# Altium PCB Extend Board-20131128.PcbDoc
Units mil, origin at the board's own origin, x right, y up, seen from the top; angles counter-clockwise.
Board outline 3590 x 3685 mil, 2 copper layers (Top Layer, Bottom Layer); 24 components, 40 nets, 168 pads, 6 vias.
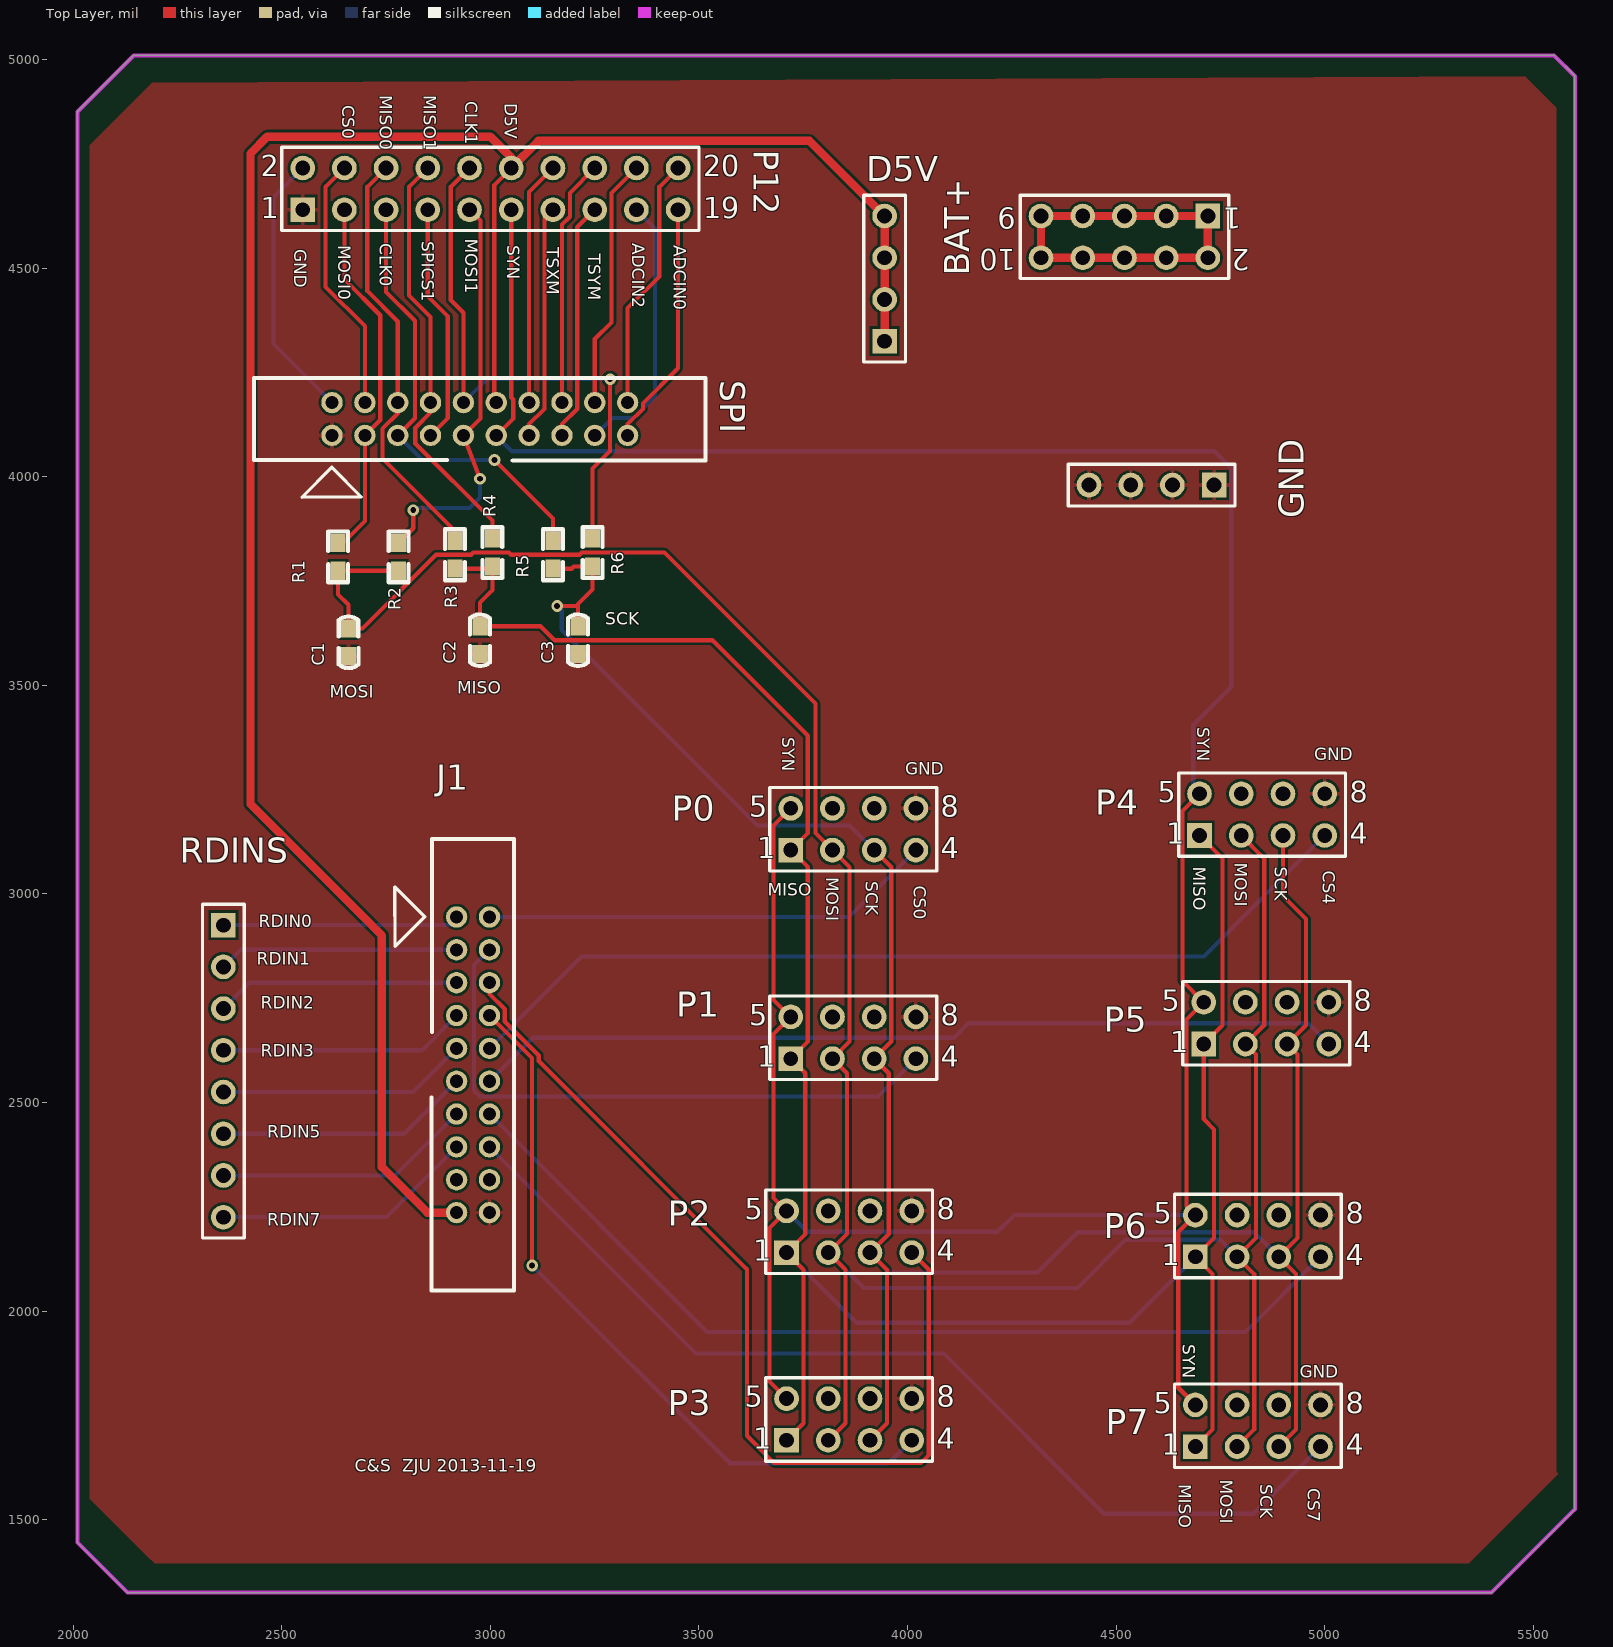
[diagram p0: Top Layer view]
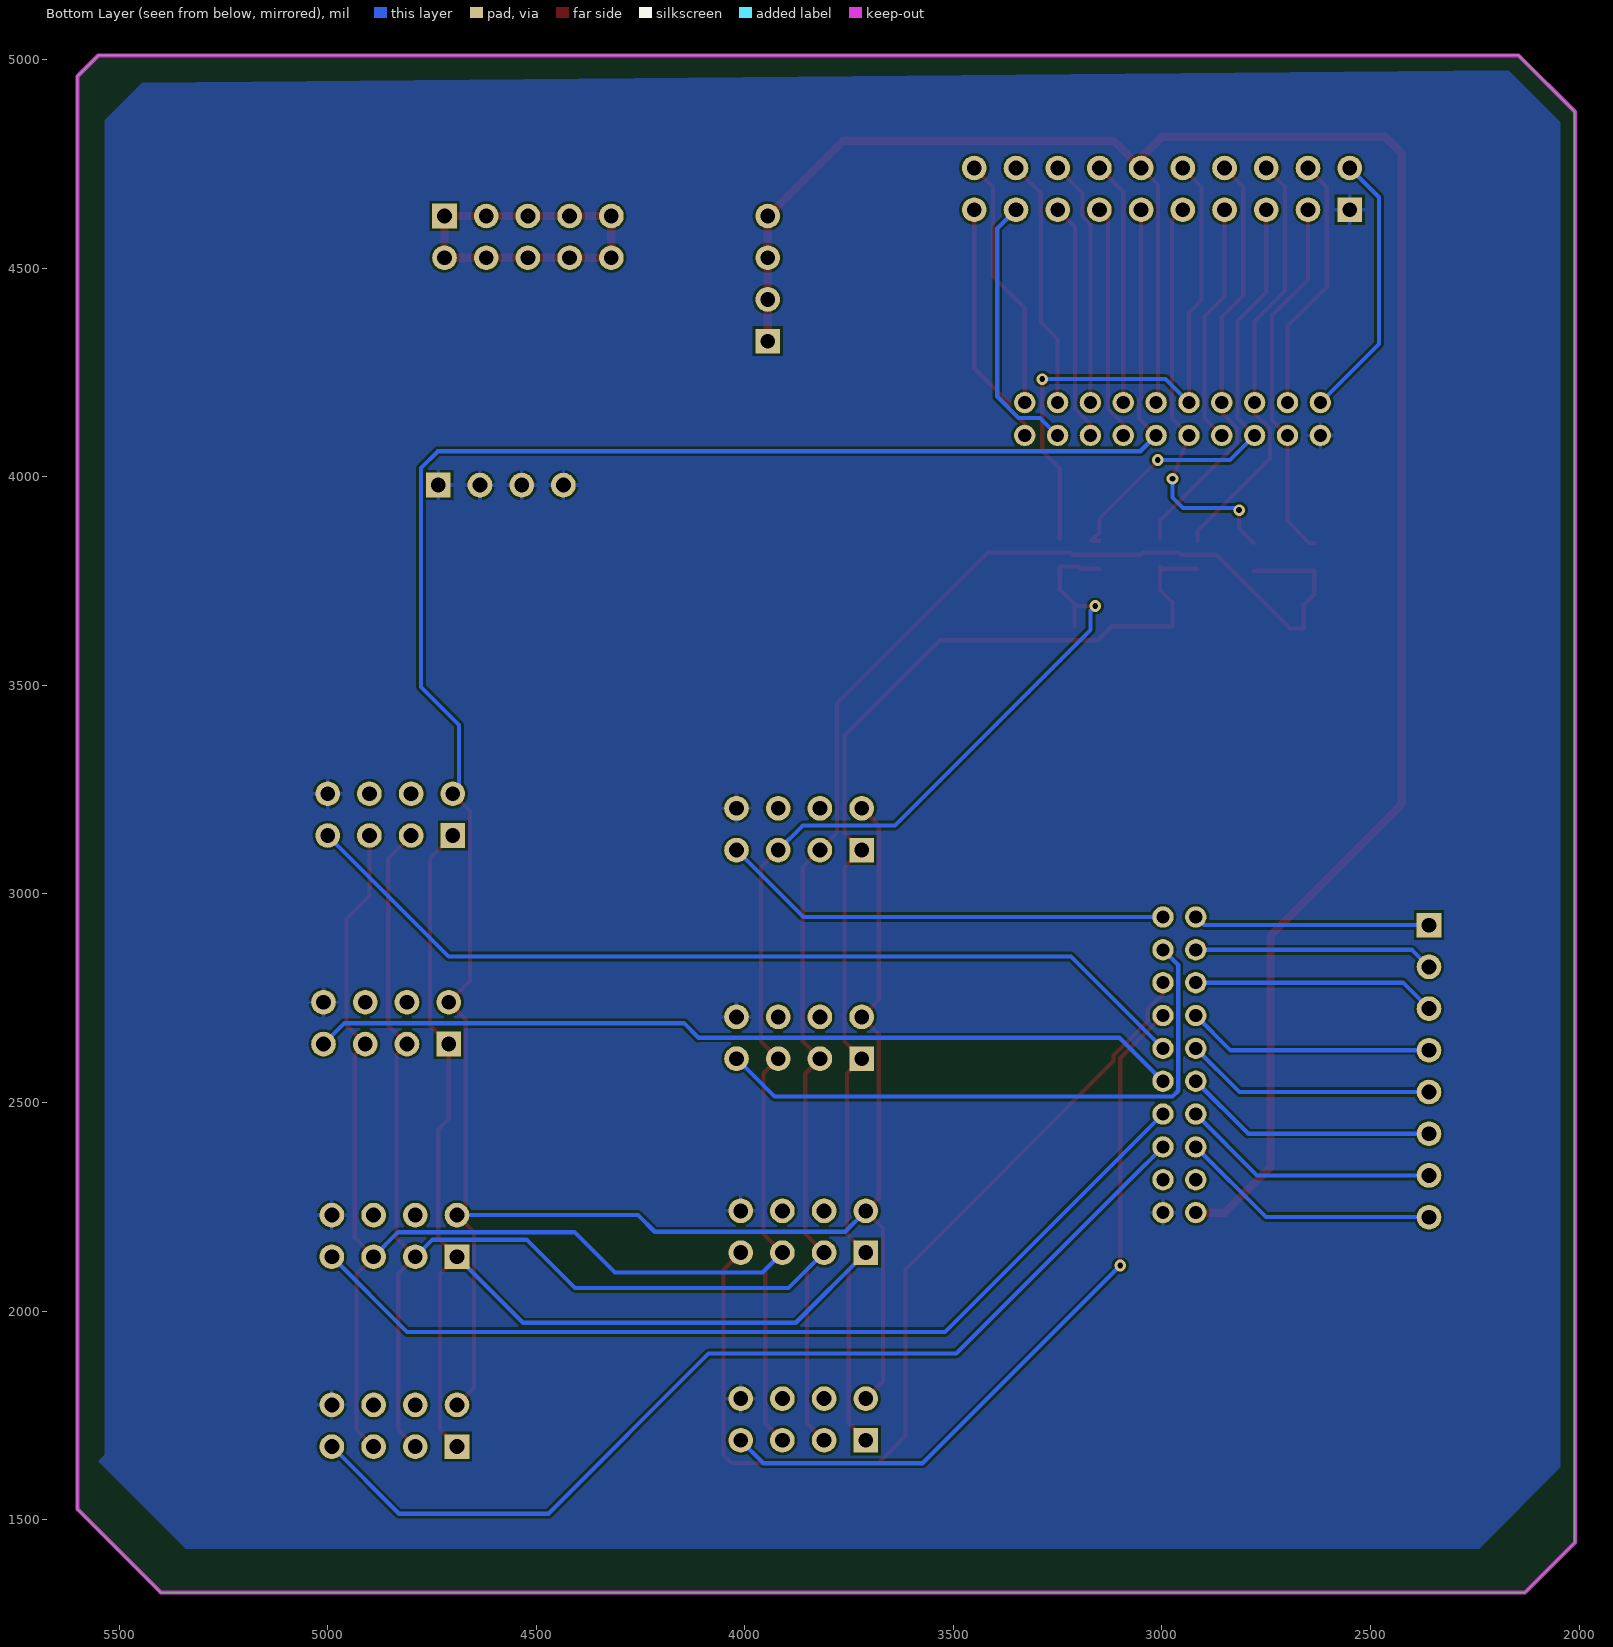
[diagram p1: Bottom Layer view, seen from below]

## Layer stack, top to bottom
Top Layer: signal copper 1.4
Dielectric: dielectric 12.6, FR-4, Dk 4.8
Bottom Layer: signal copper 1.4

## Board outline
2010,1445 2130,1325 5400,1325 5600,1525 5600,4960 5550,5010 2145,5010 2010,4875

## Design rules (kind name [scope] priority, off if disabled: settings)
Clearance [All] p1: gap=6
MinimumSolderMaskSliver [All] p1: minsoldermaskwidth=6
PolygonConnect [All] p1: connectstyle=Relief reliefconductorwidth=10 reliefentries=4 polygonreliefangle="90 Angle"
RoutingVias [All] p1: holewidth=14 width=28 viastyle="Through Hole" minholewidth=14 minwidth=20 maxholewidth=14 maxwidth=50
SilkscreenOverComponentPads [All] p1: minsilkscreentomaskgap=6
SolderMaskExpansion [All] p1: expansion=4
Width [All] p1: maxlimit=20 minlimit=8 preferedwidth=10 minimp=50.000000 maximp=50.000000 favimp=50.000000
26 further rules are at their usual default settings.

## Components (designator, comment, footprint, x,y, rotation, side; value= is the part's Value field where it differs from the comment)
BAT+ "Header 5X2" HDR2X5 4720,4625 r180 top
C1 "CAP" 0603_CAP 2660,3605 r90 top
C2 "CAP" 0603_CAP 2975,3610 r90 top
C3 "CAP" 0603_CAP 3210,3610 r90 top
D5V "Header 4" HDR1X4 3945,4325 r90 top (schematic designator P9)
GND "Header 4" HDR1X4 4735,3980 r180 top (schematic designator P10)
J1 "CON20" IDC20S 2920,2945 r270 top
P0 "Header 4X2A" HDR2X4_CEN 3720,3105 r0 top (schematic designator P1)
P1 "Header 4X2A" HDR2X4_CEN 3720,2605 r0 top (schematic designator P2)
P2 "Header 4X2A" HDR2X4_CEN 3710,2140 r0 top (schematic designator P3)
P3 "Header 4X2A" HDR2X4_CEN 3710,1690 r0 top (schematic designator P4)
P4 "Header 4X2A" HDR2X4_CEN 4700,3140 r0 top (schematic designator P5)
P5 "Header 4X2A" HDR2X4_CEN 4710,2640 r0 top (schematic designator P6)
P6 "Header 4X2A" HDR2X4_CEN 4690,2130 r0 top (schematic designator P7)
P7 "Header 4X2A" HDR2X4_CEN 4690,1675 r0 top (schematic designator P8)
P12 "Header 10X2" HDR2X10 2550,4640 r0 top
R1 "10K" 0603 2635,3810 r90 top
R2 "10K" 0603 2780,3810 r90 top
R3 "10K" 0603 2915,3815 r90 top
R4 "10K" 0603 3005,3820 r90 top
R5 "10K" 0603 3150,3815 r90 top
R6 "10K" 0603 3245,3820 r90 top
RDINS "Header 8" HDR1X8 2360,2925 r270 top (schematic designator P11)
SPI "CON20" IDC20S 2620,4100 r0 top (schematic designator J2)

## Footprints (in the part's own frame and the unit in brackets; to place one, negate y for a bottom-side part, rotate by r counter-clockwise, add the part's x,y. Pads: shape width x height; smd on the part's side, far side on the other; paste and mask are expansions set on the pad)
0603 [mm]
  rect 1.1x0.9 smd: 1(-0.9,0) 2(0.8,0)
  silkscreen extent -1.6,-0.6 1.5,0.6
0603_CAP [mm]
  rect 1.1x0.9 smd: 1(-0.9,0) 2(0.8,0)
  silkscreen extent -1.62,-0.6 1.52,0.6
HDR1X4 [mm] "Connector; Header; 4 Position"
  rect 1.5x1.5 hole 0.9: 1(0,0)
  round 1.5 hole 0.9: 2(2.54,0) 3(5.08,0) 4(7.62,0)
  silkscreen extent -1.27,-1.27 8.89,1.27
HDR1X8 [mm] "Connector; Header; 8 Position"
  rect 1.5x1.5 hole 0.9: 1(0,0)
  round 1.5 hole 0.9: 2(2.54,0) 3(5.08,0) 4(7.62,0) 5(10.16,0) 6(12.7,0) 7(15.24,0) 8(17.78,0)
  silkscreen extent -1.27,-1.27 19.05,1.27
HDR2X4_CEN [mm] "Connector; Header; 4x2 Position"
  rect 1.5x1.5 hole 0.9: 1(0,0)
  round 1.5 hole 0.9: 2(2.54,0) 3(5.08,0) 4(7.62,0) 5(0,2.54) 6(2.54,2.54) 7(5.08,2.54) 8(7.62,2.54)
  silkscreen extent -1.27,-1.27 8.89,3.81
HDR2X5 [mm] "Connector; Header; 5x2 Position"
  rect 1.5x1.5 hole 0.9: 1(0,0)
  round 1.5 hole 0.9: 2(0,2.54) 3(2.54,0) 4(2.54,2.54) 5(5.08,0) 6(5.08,2.54) 7(7.62,0) 8(7.62,2.54) 9(10.16,0) 10(10.16,2.54)
  silkscreen extent -1.27,-1.27 11.43,3.81
HDR2X10 [mm] "Connector; Header; 10x2 Position"
  rect 1.5x1.5 hole 0.9: 1(0,0)
  round 1.5 hole 0.9: 2(0,2.54) 3(2.54,0) 4(2.54,2.54) 5(5.08,0) 6(5.08,2.54) 7(7.62,0) 8(7.62,2.54) 9(10.16,0) 10(10.16,2.54) 11(12.7,0) 12(12.7,2.54) 13(15.24,0) 14(15.24,2.54) 15(17.78,0) 16(17.78,2.54) 17(20.32,0) 18(20.32,2.54) 19(22.86,0) 20(22.86,2.54)
  silkscreen extent -1.27,-1.27 24.13,3.81
IDC20S [mm]
  round 1.3 hole 0.8: 1(0.01,-0.025) 2(0.01,1.975) 3(2.01,-0.025) 4(2.01,1.975) 5(4.01,-0.025) 6(4.01,1.975) 7(6.01,-0.025) 8(6.01,1.975) 9(8.01,-0.025) 10(8.01,1.975) 11(10.01,-0.025) 12(10.01,1.975) 13(12.01,-0.025) 14(12.01,1.975) 15(14.01,-0.025) 16(14.01,1.975) 17(16.01,-0.025) 18(16.01,1.975) 19(18.01,-0.025) 20(18.01,1.975)
  silkscreen extent -4.74,-3.78 22.76,3.47

## Part data
BAT+: "Header, 5-Pin, Dual row"
D5V GND: "Header, 4-Pin"
P0 P1 P2 P3 P4 P5 P6 P7: "Header, 4-Pin, Dual row"
P12: "Header, 10-Pin, Dual row"
R1 R2 R3 R4 R5 R6: library part RES
RDINS: "Header, 8-Pin"

## Via types
v1: diameter 28, hole 14, Top Layer to Bottom Layer, 6 vias

## Nets (pads, with @x,y where several pads share a name; then routed paths per layer and width w, separated by ;. In a path a pad name is that pad's centre, name@x,y a point inside that pad or via, vN(x,y) a via of type N, cw(c..) or ccw(c..) an arc to the next point about the centre after c; other vN are vias at no path point)
ADCIN0: P12.19 SPI.19 | length 591.1
  Top Layer w10: SPI.19 3329.05,4126 3365.64,4162.59 3365.64,4175.64 3450,4260 P12.19
ADCIN1: P12.20 SPI.20 | length 612.4
  Top Layer w10: SPI.20 3329.05,4404.05 3405,4480 3405,4695 P12.20
ADCIN2: P12.17 SPI.17 | length 649.9
  Bottom Layer w10: SPI.17 3292.46,4141.16 3344.2,4141.16 3395,4191.95 3395,4595 P12.17
ADCIN3: P12.18 SPI.18 | length 603.5
  Top Layer w10: SPI.18 3250.31,4330.31 3290,4370 3290,4622.16 3290.53,4622.69 3290.53,4680.53 P12.18
BAT+: BAT+.1 BAT+.2 BAT+.3 BAT+.4 BAT+.5 BAT+.6 BAT+.7 BAT+.8 BAT+.9 BAT+.10 | length 1002.1
  Top Layer w20: BAT+.9@4315,4625 4320,4620 BAT+.10 BAT+.8 BAT+.6 BAT+.4 BAT+.2 BAT+.1 BAT+.3 BAT+.5 BAT+.7 BAT+.9
CS0: J1.2 P0.4 | length 1088.7
  Bottom Layer w10: J1.2 3859.61,2944.61 P0.4
CS1: J1.4 P1.4 | length 1455.6
  Bottom Layer w10: J1.4 2961,2829.13 2961,2528 2975,2514 3929,2514 P1.4
CS2: J1.6 P2.4 | length 2314.6
  Top Layer w10: J1.6 2997.75,2760.14 3034.34,2723.55 3034.34,2694.43 3116,2612.77 3116,2599 3615,2100 3615,1701 3680,1636 4032,1636 4051,1655 4051,2099 P2.4
CS3: J1.8 P3.4 | length 1770.9
  Top Layer w10: J1.8 3100,2606.14 v1(3100,2109)
  Bottom Layer w10: v1(3100,2109) 3574,1635 3955,1635 P3.4
CS4: J1.10 P4.4 | length 2213.6
  Bottom Layer w10: J1.10 3218.09,2850 4710,2850 P4.4
CS5: J1.12 P5.4 | length 2090.6
  Bottom Layer w10: J1.12 3076.83,2630 3101.83,2655 4111,2655 4146,2690 4960,2690 P5.4
CS6: J1.14 P6.4 | length 2283.1
  Bottom Layer w10: J1.14 3519.92,1950 4810,1950 P6.4
CS7: J1.16 P7.4 | length 2423.2
  Bottom Layer w10: J1.16 3077.18,2314 3493.18,1898 4087,1898 4471,1514 4829,1514 P7.4
D5V: D5V.1 D5V.2 D5V.3 D5V.4 J1.19 P12.12 SPI.12 | length 5349.4
  Top Layer w10: SPI.12 3009.47,4182.36 3009.47,4699.47 P12.12
  Top Layer w20: J1.19 2849.05,2235.95 2740,2345 2740,2900 2425,3215 2425,4775 2465,4815 3000,4815 3050,4765 P12.12 3115,4805 3765,4805 D5V.4 D5V.3 D5V.2 D5V.1
DAC_OUT1: P12.2 SPI.2 | length 649.4
  Bottom Layer w10: P12.2 2480,4670 2480,4318.13 SPI.2
GND: C1.1 C2.1 C3.1 GND.1 GND.2 GND.3 GND.4 J1.20 P0.8 P1.8 P2.8 P3.8 P4.8 P5.8 P6.8 P7.8 P12.1 SPI.1
MISO: C2.2 P0.1 P1.1 P2.1 P3.1 P4.1 P5.1 P6.1 P7.1 R3.1 R4.1 | length 5676.8
  Top Layer w10: R3.1 R4.1@3000,3779.57 ; 2957,3779.57 R4.1@3000,3779.57 ; P3.1 3751,1731 3751,2099 P2.1 3755,2185 3755,2570 P1.1 3761,2646 3761,3064 P0.1 3761,3146 3761,3379 3532,3608 3154,3608 3120.5,3641.5 C2.2 2975,3698 3005,3728 R4.1 R4.1@3000,3779.57 ; P7.1 4731,1716 4731,2089 P6.1 4735,2175 4735,2435 4710,2460 P5.1 4755,2685 4755,3085 P4.1
  Bottom Layer w10: P2.1 3878,1972 4532,1972 P6.1
MOSI: C1.2 P0.2 P1.2 P2.2 P3.2 P4.2 P5.2 P6.2 P7.2 R1.1 R2.1 | length 6175.4
  Top Layer w10: R2.1 R1.1 2635,3718 2660,3693 C1.2 2693.5,3636.5 2870,3813 2954,3813 2959,3818 3045,3818 3050,3813 3214,3813 3219,3818 3417,3818 3779,3456 3779,3146 P0.2 3861,3064 3861,2646 P1.2 3855,2570 3855,2185 P2.2 3851,2099 3851,1731 P3.2 ; P7.2 4831,1716 4831,2089 P6.2 4835,2175 4835,2615 P5.2 4855,2685 4855,3085 P4.2
  Bottom Layer w10: P2.2 3895,2055 4407,2055 4523,2171 4749,2171 P6.2
NetP12_4: P12.4 SPI.4 | length 619.9
  Top Layer w10: P12.4 2605,4695 2605,4455 2699.13,4360.87 SPI.4
NetP12_7: P12.7 SPI.7 | length 578
  Top Layer w10: P12.7 2850,4432 2898,4384 2898,4140.4 SPI.7
RDIN0: J1.1 RDINS.1 | length 567.1
  Bottom Layer w10: RDINS.1 2899.4,2925 J1.1
RDIN1: J1.3 RDINS.2 | length 575.9
  Bottom Layer w10: RDINS.2 2400.87,2865.87 J1.3
RDIN2: J1.5 RDINS.3 | length 584.7
  Bottom Layer w10: RDINS.3 2422.13,2787.13 J1.5
RDIN3: J1.7 RDINS.4 | length 593.6
  Bottom Layer w10: RDINS.4 2835.61,2625 J1.7
RDIN4: J1.9 RDINS.5 | length 602.4
  Bottom Layer w10: RDINS.5 2814.35,2525 J1.9
RDIN5: J1.11 RDINS.6 | length 611.2
  Bottom Layer w10: RDINS.6 2793.09,2425 J1.11
RDIN6: J1.13 RDINS.7 | length 620
  Bottom Layer w10: RDINS.7 2771.83,2325 J1.13
RDIN7: J1.15 RDINS.8 | length 628.8
  Bottom Layer w10: RDINS.8 2750.57,2225 J1.15
SCK: C3.2 P0.3 P1.3 P2.3 P3.3 P4.3 P5.3 P6.3 P7.3 R5.1 R6.1 | length 5481.3
  Top Layer w10: R5.1 3195,3779.57 3200,3784.57 R6.1 3245,3730 3210,3695 C3.2 ; v1(3160,3690) 3207.5,3690 ; P3.3 3951,1731 3951,2099 P2.3 3955,2185 3955,2570 P1.3 3961,2646 3961,3064 P0.3 ; P7.3 4931,1716 4931,2089 P6.3 4935,2175 4935,2615 P5.3 4955,2685 4955,2940 4900,2995 P4.3
  Bottom Layer w10: v1(3160,3690) 3171,3679 3171,3633 3640,3164 3861,3164 P0.3 ; P2.3 3958,2092 4311,2092 4408,2189 4831,2189 P6.3
SPICLK0: P12.5 R5.2 SPI.5 | length 1122.3
  Top Layer w10: P12.5 2750,4443 2819,4374 2819,4140.14 SPI.5 ; v1(3010,4040) 3150,3900 3150,3865.99 3169.5,3846.5 R5.2
  Bottom Layer w10: SPI.5 2836.87,4040 v1(3010,4040)
SPICLK1: P12.10 R6.2 SPI.10 | length 1368.3
  Top Layer w10: SPI.10 2935.35,4393 2905,4423.35 2905,4695 P12.10 ; R6.2 3245,4020 3287,4062 v1(3287,4234)
  Bottom Layer w10: SPI.10 2991.6,4234 v1(3287,4234)
SPIMISO0: P12.6 R3.2 SPI.6 | length 1029.7
  Top Layer w10: P12.6 2705,4695 2705,4444.87 2777.87,4372 SPI.6 2777.87,4152 2741,4115.13 2741,4044 2915,3870 R3.2
SPIMISO1: P12.8 R4.2 SPI.8 | length 1020.3
  Top Layer w10: P12.8 2805,4695 2805,4434.61 2856.61,4383 SPI.8 2856.61,4153.61 2820,4117 2820,4080 3005,3895 R4.2
SPIMOSI0: P12.3 R1.2 SPI.3 | length 883.1
  Top Layer w10: R1.2 2647.11,3841.5 2699.13,3893.52 SPI.3 2736,4135.88 2736,4387 2650,4473 P12.3
SPIMOSI1: P12.9 R2.2 SPI.9 | length 990.3
  Top Layer w10: R2.2 2815,3876.5 v1(2815,3920) ; P12.9 2976,4614 2976,4139.66 SPI.9 v1(2975,3995)
  Bottom Layer w10: v1(2815,3920) 2820,3925 2950,3925 2975,3950 v1(2975,3995)
SYN: P0.5 P1.5 P2.5 P3.5 P4.5 P5.5 P6.5 P7.5 P12.11 SPI.11 | length 7271.9
  Top Layer w10: SPI.11 3055,4139.92 3055,4185 3050,4190 P12.11 ; P3.5 3669,1831 3669,2199 P2.5 3679,2271 3679,2664 P1.5 3679,2746 3679,3164 P0.5 ; P7.5 4649,1816 4649,2189 P6.5 4669,2251 4669,2699 P5.5 4659,2791 4659,3199 P4.5
  Bottom Layer w10: SPI.11 3052.09,4061 4736,4061 4776,4021 4776,3496 4685,3405 4685,3255 P4.5 ; P2.5 3760,2190 4216,2190 4256,2230 P6.5
TSXM: P12.13 SPI.13 | length 564.7
  Top Layer w10: SPI.13 3092.83,4126 3129.42,4162.59 3129.42,4619.42 P12.13
TSXP: P12.14 SPI.14 | length 585.9
  Top Layer w10: SPI.14 3092.83,4682.83 P12.14
TSYM: P12.15 SPI.15 | length 573.5
  Top Layer w10: SPI.15 3171.57,4126 3208.16,4162.59 3208.16,4598.16 P12.15
TSYP: P12.16 SPI.16 | length 594.7
  Top Layer w10: SPI.16 3171.57,4604.25 3190.53,4623.21 3190.53,4680.53 P12.16
pads on no net: J1.17 J1.18 P0.6 P0.7 P1.6 P1.7 P2.6 P2.7 P3.6 P3.7 P4.6 P4.7 P5.6 P5.7 P6.6 P6.7 P7.6 P7.7

## Polygon pours and split planes (outlines as drawn)
GND on Bottom Layer "Bottom Layer-No Net" (solid, remove dead copper, pour order 4): 2170,4975 2045,4850 2045,4810 2045,1625 2240,1430 5295,1430 5340,1430 5550,1640 5535,1655 5535,4855 5445,4945
GND on Top Layer "Bottom Layer-No Net" (solid, remove dead copper, pour order 6): 2190,4945 2040,4795 2040,4775 2040,1550 2180,1410 2195,1395 5310,1395 5345,1395 5560,1610 5555,1615 5555,4840 5555,4885 5480,4960

## Keep-outs
Keep-Out Layer:
  the board outline again, w10

## Silkscreen, mask and mechanical layers (free items; w line width, h text height)
Top Overlay:
  text "MISO0" at 2735,4915 h30 r270
  text "MISO1" at 2840,4915 h30 r270
  text "CLK1" at 2940,4900 h30 r270
  text "D5V" at 3035,4895 h30 r270
  text "CS0" at 2645,4890 h30 r270
  text "MOSI1" at 2940,4570 h30 r270
  text "SPICS1" at 2835,4565 h30 r270
  text "CLK0" at 2735,4560 h30 r270
  text "ADCIN2" at 3340,4560 h30 r270
  text "MOSI0" at 2635,4555 h30 r270
  text "SYN" at 3040,4555 h30 r270
  text "ADCIN0" at 3440,4555 h30 r270
  text "TSXM" at 3135,4550 h30 r270
  text "GND" at 2530,4545 h30 r270
  text "TSYM" at 3235,4535 h30 r270
  text "SCK" at 3275,3645 h30
  text "MISO" at 2920,3480 h30
  text "MOSI" at 2615,3470 h30
  text "SYN" at 4695,3400 h30 r270
  text "SYN" at 3700,3375 h30 r270
  text "GND" at 4975,3320 h30
  text "GND" at 3995,3285 h30
  text "MOSI" at 4785,3075 h30 r270
  text "MISO" at 4685,3065 h30 r270
  text "SCK" at 4880,3065 h30 r270
  text "CS4" at 4995,3055 h30 r270
  text "MOSI" at 3805,3040 h30 r270
  text "SCK" at 3900,3030 h30 r270
  text "CS0" at 4015,3020 h30 r270
  text "MISO" at 3665,2995 h30
  text "RDIN0" at 2445,2920 h30
  text "RDIN1" at 2440,2830 h30
  text "RDIN2" at 2450,2725 h30
  text "RDIN3" at 2450,2610 h30
  text "RDIN5" at 2465,2415 h30
  text "RDIN7" at 2465,2205 h30
  text "SYN" at 4660,1920 h30 r270
  text "GND" at 4940,1840 h30
  text "C&S  ZJU 2013-11-19" at 2675,1615 h30
  text "MOSI" at 4750,1595 h30 r270
  text "MISO" at 4650,1585 h30 r270
  text "SCK" at 4845,1585 h30 r270
  text "CS7" at 4960,1575 h30 r270

## Text inside footprints (layer, text, board x,y; h text height)
BAT+: Top Overlay "2" at 4820,4545 h50 r180; Top Overlay "1" at 4800,4645 h50 r180; Top Overlay "9" at 4260,4645 h50 r180; Top Overlay "10" at 4260,4545 h50 r180
P0: Top Overlay "5" at 3620,3185 h50; Top Overlay "1" at 3640,3085 h50; Top Overlay "4" at 4080,3085 h50; Top Overlay "8" at 4080,3185 h50
P1: Top Overlay "5" at 3620,2685 h50; Top Overlay "1" at 3640,2585 h50; Top Overlay "4" at 4080,2585 h50; Top Overlay "8" at 4080,2685 h50
P2: Top Overlay "5" at 3610,2220 h50; Top Overlay "1" at 3630,2120 h50; Top Overlay "4" at 4070,2120 h50; Top Overlay "8" at 4070,2220 h50
P3: Top Overlay "5" at 3610,1770 h50; Top Overlay "1" at 3630,1670 h50; Top Overlay "4" at 4070,1670 h50; Top Overlay "8" at 4070,1770 h50
P4: Top Overlay "5" at 4600,3220 h50; Top Overlay "1" at 4620,3120 h50; Top Overlay "4" at 5060,3120 h50; Top Overlay "8" at 5060,3220 h50
P5: Top Overlay "5" at 4610,2720 h50; Top Overlay "1" at 4630,2620 h50; Top Overlay "4" at 5070,2620 h50; Top Overlay "8" at 5070,2720 h50
P6: Top Overlay "5" at 4590,2210 h50; Top Overlay "1" at 4610,2110 h50; Top Overlay "4" at 5050,2110 h50; Top Overlay "8" at 5050,2210 h50
P7: Top Overlay "5" at 4590,1755 h50; Top Overlay "1" at 4610,1655 h50; Top Overlay "4" at 5050,1655 h50; Top Overlay "8" at 5050,1755 h50
P12: Top Overlay "20" at 3510,4720 h50; Top Overlay "19" at 3510,4620 h50; Top Overlay "1" at 2450,4620 h50; Top Overlay "2" at 2450,4720 h50